# Altium PCB PCB1.PcbDoc
Units mil, origin at the board's own origin, x right, y up, seen from the top; angles counter-clockwise.
Board outline 1240 x 3200 mil, 2 copper layers (Top Layer, Bottom Layer); 43 components, 27 nets, 134 pads, 48 vias.
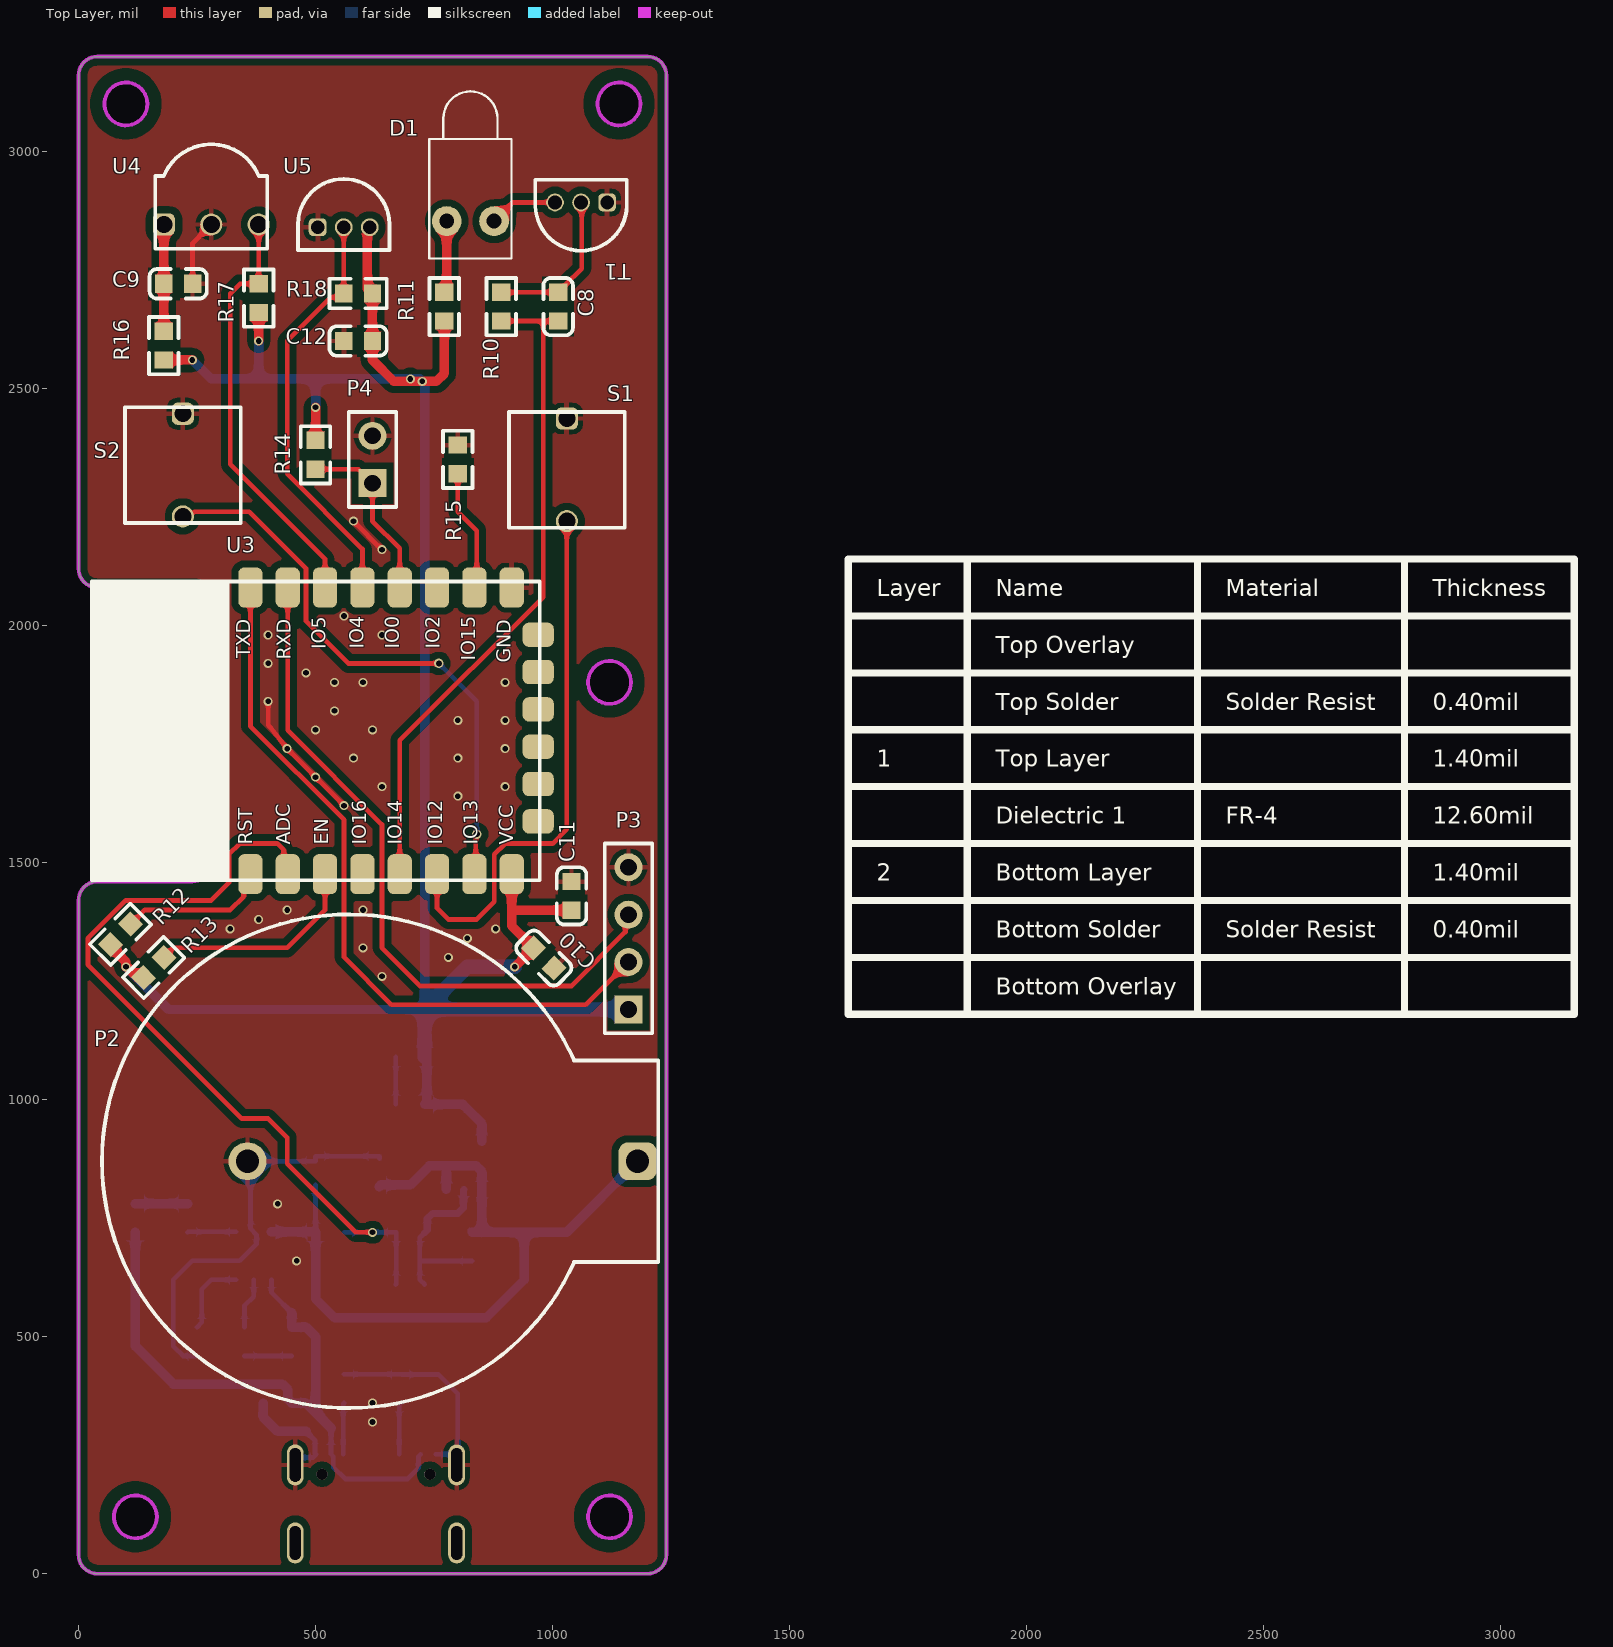
[diagram p0: Top Layer view]
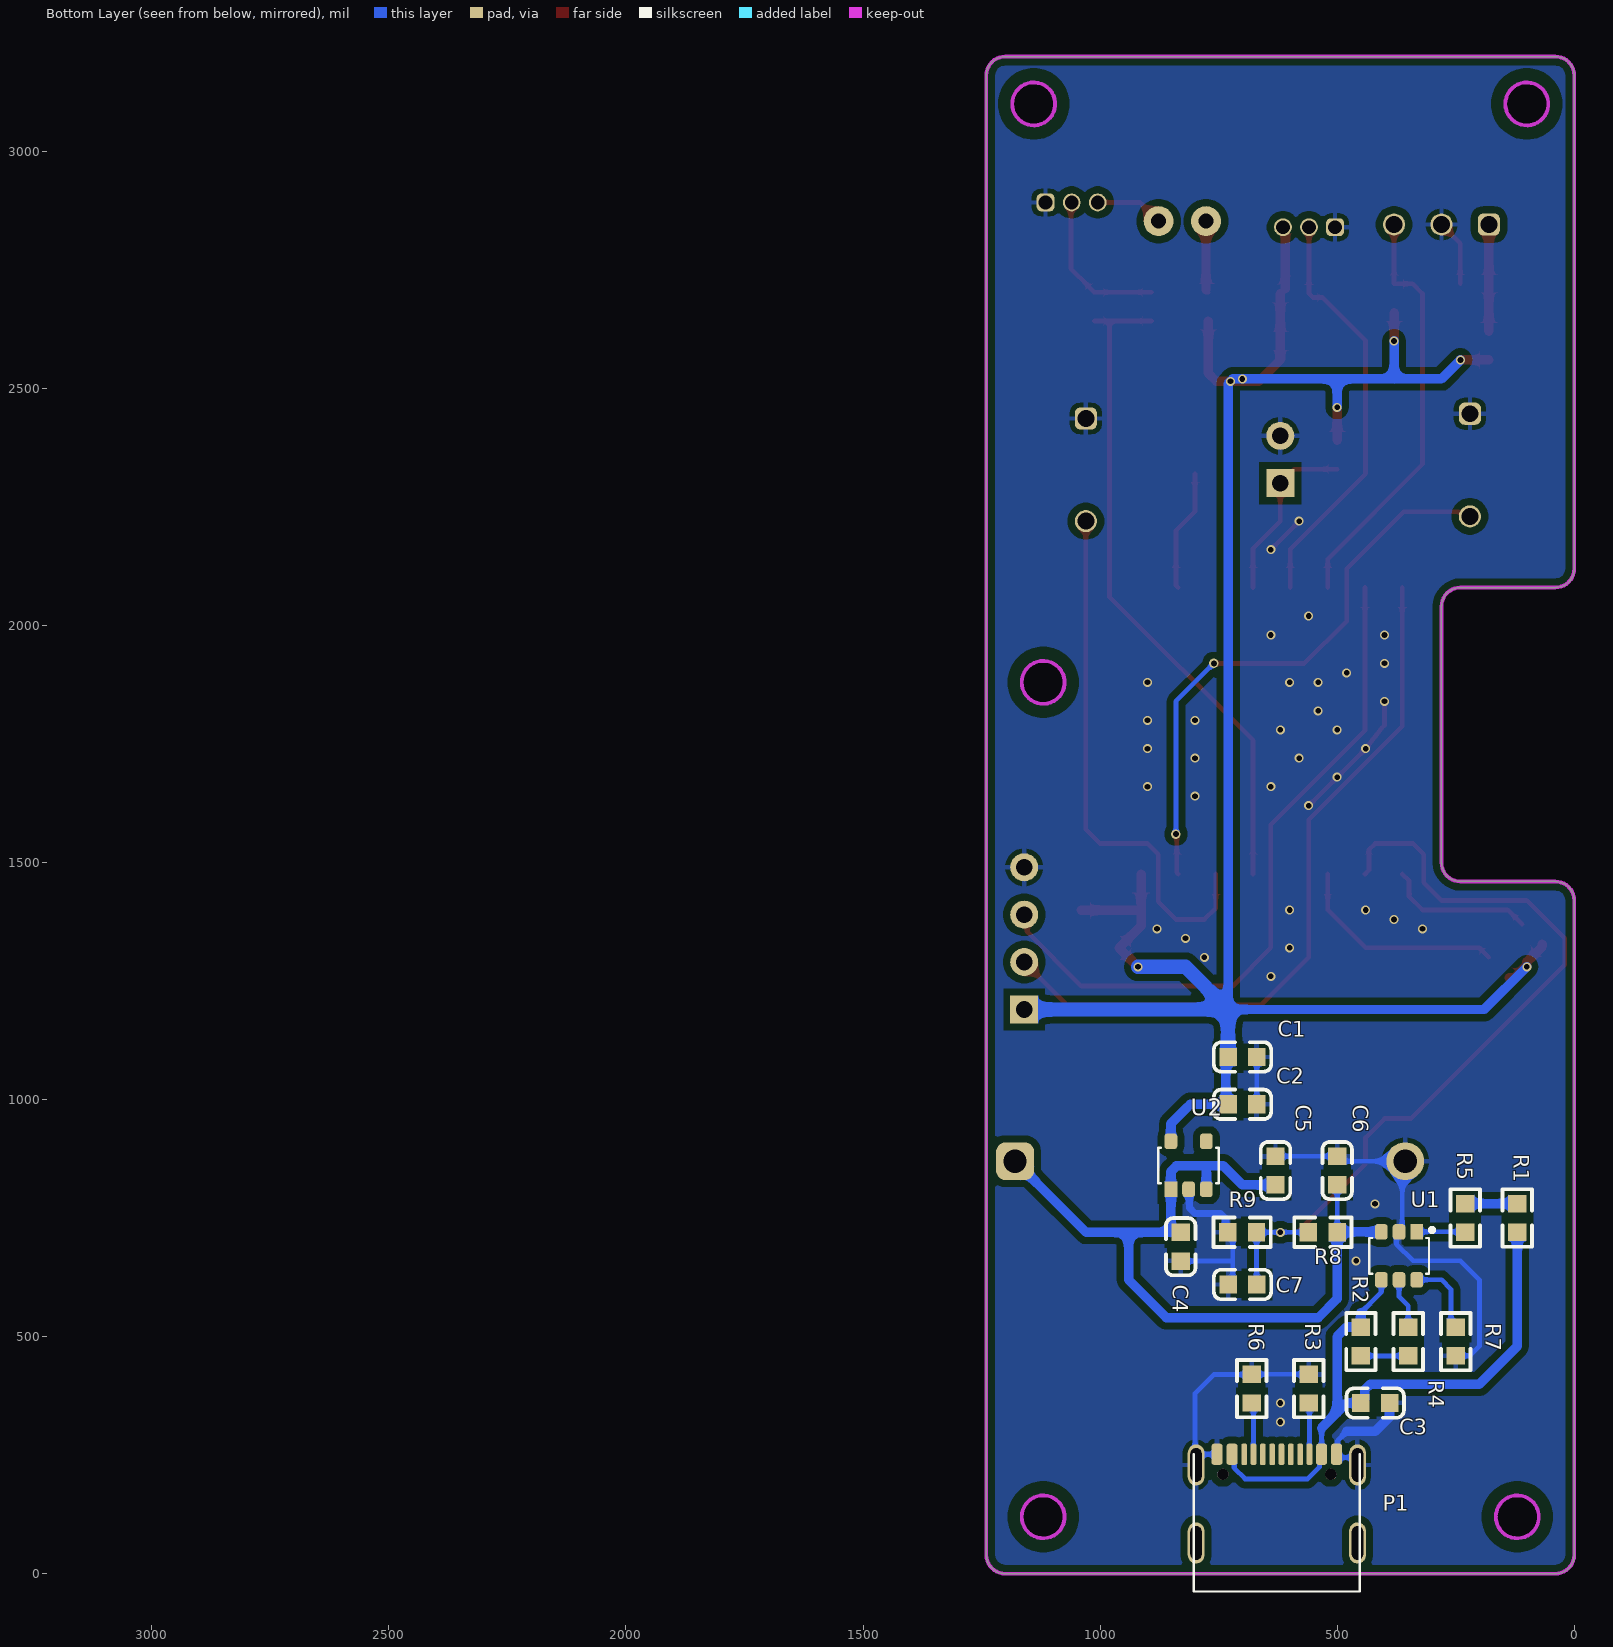
[diagram p1: Bottom Layer view, seen from below]
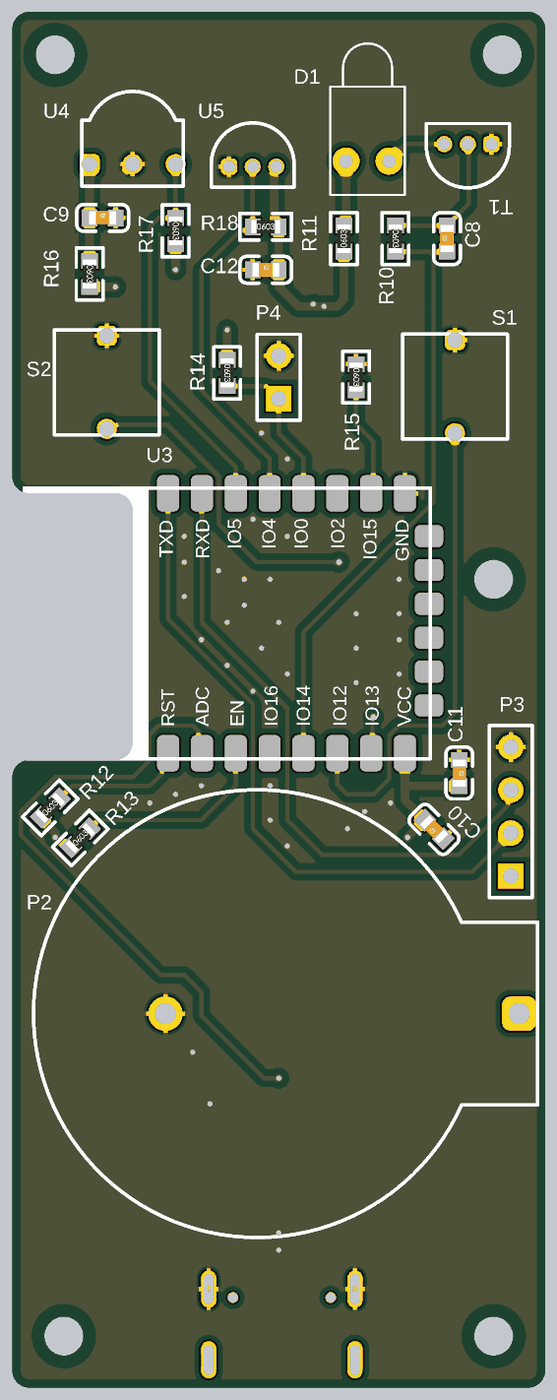
[diagram p2: 3D render of the assembled board from above, using the file's embedded part models]
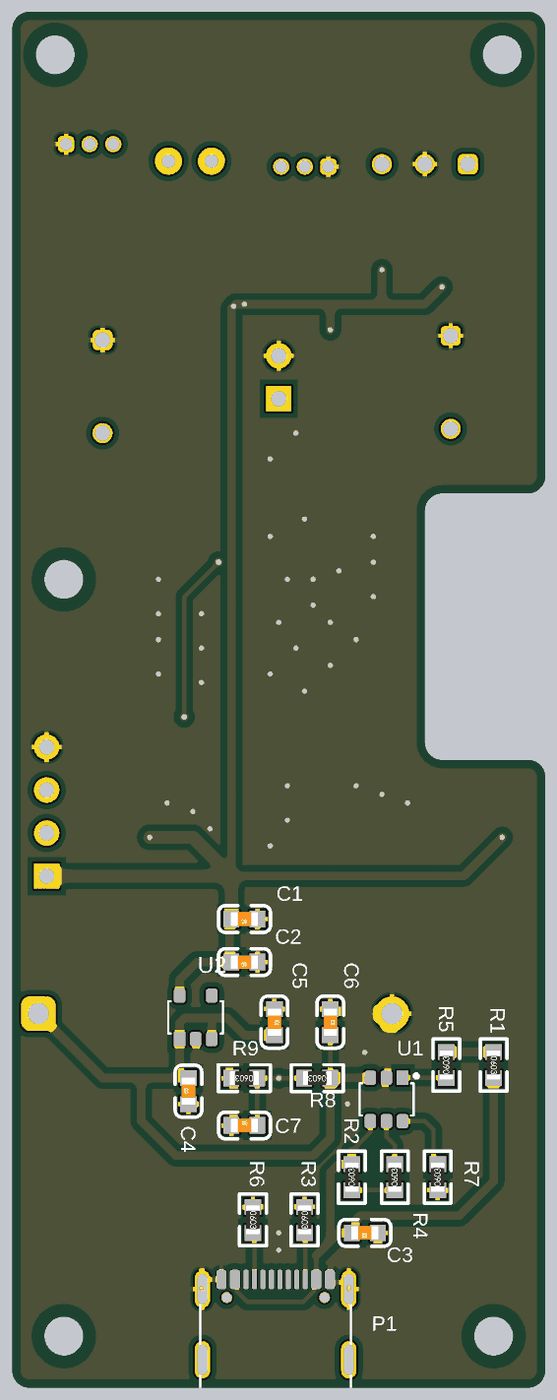
[diagram p3: 3D render of the assembled board from below, using the file's embedded part models]

## Layer stack, top to bottom
Top Solder: solder mask 0.4, Solder Resist, Dk 3.5
Top Layer: signal copper 1.4
Dielectric 1: dielectric 12.6, FR-4, Dk 4.8
Bottom Layer: signal copper 1.4
Bottom Solder: solder mask 0.4, Solder Resist, Dk 3.5

## Board outline
0,40 ccw(c40,40) 40,0 1200,0 ccw(c1200,40) 1240,40 1240,3160 ccw(c1200,3160) 1200,3200 40,3200 ccw(c40,3160) 0,3160 0,2120 ccw(c40,2120) 40,2080 240,2080 cw(c240,2040) 280,2040 280,1500 cw(c240,1500) 240,1460 40,1460 ccw(c40,1420) 0,1420
cut-out: 74.72,120 ccw(c120,120) 120,74.72 ccw(c120,120) 165.28,120 ccw(c120,120) 120,165.28 ccw(c120,120)
cut-out: 1074.72,120 ccw(c1120,120) 1120,74.72 ccw(c1120,120) 1165.28,120 ccw(c1120,120) 1120,165.28 ccw(c1120,120)
cut-out: 1074.72,1880 ccw(c1120,1880) 1120,1834.72 ccw(c1120,1880) 1165.28,1880 ccw(c1120,1880) 1120,1925.28 ccw(c1120,1880)
cut-out: 1094.72,3100 ccw(c1140,3100) 1140,3054.72 ccw(c1140,3100) 1185.28,3100 ccw(c1140,3100) 1140,3145.28 ccw(c1140,3100)
cut-out: 100,3054.72 cw(c100,3100) 54.72,3100 cw(c100,3100) 100,3145.28 cw(c100,3100) 145.28,3100 cw(c100,3100)

## Design rules (kind name [scope] priority, off if disabled: settings)
Clearance Clearance_1 [InPolygon] p1: gap=15 ignorepadtopadclearanceinfootprint=TRUE
Clearance [All] p2: gap=6 ignorepadtopadclearanceinfootprint=TRUE
MinimumSolderMaskSliver [All] p1: minsoldermaskwidth=-99
PolygonConnect PolygonConnect_1 [All vs IsVia] p1: connectstyle=Direct reliefconductorwidth=10 reliefentries=4 polygonreliefangle="90 Angle" airgapwidth=10
PolygonConnect [All] p2: connectstyle=Relief reliefconductorwidth=10 reliefentries=4 polygonreliefangle="90 Angle" airgapwidth=10
RoutingVias [All] p1: holewidth=13 width=20 viastyle="Through Hole" minholewidth=13 minwidth=20 maxholewidth=28 maxwidth=50
SilkToSilkClearance [All] p1: silktosilkclearance=-99
SilkToSolderMaskClearance [IsPad] p1: minsilkscreentomaskgap=-99 clearancetoexposedcopper=TRUE
SolderMaskExpansion [All] p1: expansion=5 istentingtop=FALSE
Width [All] p1: maxlimit=99999 minlimit=10 preferedwidth=10
27 further rules are at their usual default settings.

## Components (designator, comment, footprint, x,y, rotation, side; value= is the part's Value field where it differs from the comment)
C1 "10uF" 0603_C 699.69,1090 r0 bottom
C2 "100nF" 0603_C 699.69,990 r0 bottom
C3 "10uF" 0603_C 419.68,360 r0 bottom
C4 "4.7uF" 0603_C 830,689.69 r90 bottom
C5 "220nF" 0603_C 630,850.31 r270 bottom
C6 "4.7uF" 0603_C 500,850.31 r270 bottom
C7 "100nF" 0603_C 699.68,610 r180 bottom
C8 "1nF" 0603_C 1011.61,2672.44 r90 top
C9 "4.7uF" 0603_C 210.31,2720.63 r0 top
C10 "10uF" 0603_C 981.44,1298.56 r135 top
C11 "100nF" 0603_C 1040,1429.68 r270 top
C12 "100nF" 0603_C 589.69,2600 r0 top
D1 "LED1" LED-1 826.61,2852.76 r90 top
P1 "typeC" USB_C_M 644.53,110 r180 bottom
P2 "Header 2" CR2450 570,870 r90 top locked
P3 "Header 4" HDR1X4 1160,1190 r90 top
P4 "Header 2" HDR1X2 620,2300 r90 top
R1 "NC" 0603_R 120,750.32 r270 bottom
R2 "NC" 0603_R 450,489.68 r90 bottom
R3 "5.1KΩ ±1%" 0603_R 560,390.32 r270 bottom
R4 "NC" 0603_R 350.09,489.68 r90 bottom
R5 "NC" 0603_R 230,750.31 r90 bottom
R6 "5.1KΩ ±1%" 0603_R 680,390.32 r270 bottom
R7 "4.7K" 0603_R 250,489.68 r90 bottom
R8 "330K" 0603_R 530.31,720 r0 bottom
R9 "82K" 0603_R 700.31,720 r0 bottom
R10 "1K" 0603_R 891.61,2672.44 r270 top
R11 "51R" 0603_R 771.61,2672.44 r90 top
R12 "10K" 0603_R 88.56,1348.56 r45 top
R13 "10K" 0603_R 158.56,1278.56 r45 top
R14 "10K" 0603_R 500,2360 r270 top
R15 "10K" 0603_R 800,2350.32 r270 top
R16 "62R" 0603_R 180,2590.32 r270 top
R17 "11K" 0603_R 380,2690.32 r270 top
R18 "4.7K" 0603_R 589.68,2700 r0 top
S1 "SW-PB" 6x6-key 907.95,2450.32 r270 top
S2 "SW-PB" 6x6-key 97.95,2460.32 r270 top
T1 "9014" TO-92 1060,2940 r180 top
U1 "TP4057" SOT-23-6 370,670 r270 bottom
U2 "MG6228T5-33" SOT-23-5 817.69,861.72 r90 bottom
U3 "ESP-12F" ESP-12F-16Pin 972.76,1462.82 r90 top
U4 "HS0038B" HS0038B 280,2905.63 r180 top
U5 "ds18b20" TO-92 559.37,2792.19 r0 top

## Footprints (in the part's own frame and the unit in brackets; to place one, negate y for a bottom-side part, rotate by r counter-clockwise, add the part's x,y. Pads: shape width x height; smd on the part's side, far side on the other; paste and mask are expansions set on the pad)
6x6-key [mm]
  rrect50% 1.183x1.183 hole 0.91: 1(0.35,3.1)
  round 1.183 hole 0.91: 2(5.85,3.1)
  silkscreen extent 0,0 6.2,6.2
0603_C [mm]
  rect 0.93x0.98 smd: 1(-0.77,0) 2(0.77,0)
  silkscreen extent -1.54,-0.79 1.54,0.79, body extent -0.8,-0.4 0.8,0.4, height 0.3
0603_R [mm]
  rect 0.93x0.98 smd: 1(-0.77,0) 2(0.77,0)
  silkscreen extent -1.53,-0.79 1.54,0.79, body extent -0.85,-0.4 0.85,0.4, height 0.56
CR2450 [mil]
  rrect50% 80x80 hole 49: 1(0,-609.25)
  round 80 hole 49: 2(0,213.58)
  silkscreen extent -521,-653 521,521
ESP-12F-16Pin [mm]
  rrect50% 2.145x1.3 smd: 1(0.323,15.5) 2(0.323,13.5) 3(0.323,11.5) 4(0.323,9.5) 5(0.323,7.5) 6(0.323,5.5) 7(0.323,3.5) 8(0.323,1.5) 9(15.676,1.5) 10(15.676,3.5) 11(15.676,5.5) 12(15.676,7.5) 13(15.676,9.5) 14(15.676,11.5) 15(15.676,13.5) 16(15.676,15.5)
  rrect50% 1.3x1.67 smd: n(3.15,0.081) n(5.15,0.081) n(7.15,0.081) n(9.15,0.081) n(11.15,0.081) n(13.15,0.081)
  silkscreen extent 0,0 16,24
HDR1X2 [mm] "Connector; Header; 2 Position"
  rect 1.5x1.5 hole 0.9: 1(0,0)
  round 1.5 hole 0.9: 2(2.54,0)
  silkscreen extent -1.27,-1.27 3.81,1.27
HDR1X4 [mm] "Connector; Header; 4 Position"
  rect 1.5x1.5 hole 0.9: 1(0,0)
  round 1.5 hole 0.9: 2(2.54,0) 3(5.08,0) 4(7.62,0)
  silkscreen extent -1.27,-1.27 8.89,1.27
HS0038B [mil]
  rrect50% 46.57x46.57 hole 35.83: 1(100,60)
  round 46.57 hole 35.83: 2(0,60) 3(-100,60)
  silkscreen extent -118,-109 118,111
LED-1 [mm] "LED; 2 Leads"
  round 1.6 hole 0.8: 1(0,1.27) 2(0,-1.27)
  silkscreen extent -2,-2.2 6.95,2.2
SOT-23-5 [mm]
  rect 0.839x0.684 smd: 1(-1.295,0.838)
  rrect50% 0.839x0.684 smd: 2(-1.295,-0.112) 3(-1.295,-1.062) 4(1.276,-1.062) 5(1.276,0.838)
  silkscreen extent -0.97,-1.73 0.94,1.51
SOT-23-6 [mm]
  rect 0.839x0.684 smd: 1(-1.295,0.965)
  rrect50% 0.839x0.684 smd: 2(-1.295,0.015) 3(-1.295,-0.935) 4(1.276,-0.935) 5(1.276,0.015) 6(1.276,0.965)
  silkscreen extent -1.51,-1.57 0.94,1.89
TO-92 [mil]
  rrect50% 37.52x37.52 hole 28.86: 1(-55,47.81)
  round 37.52 hole 28.86: 2(0,47.81) 3(55,47.81)
  silkscreen extent -96,0 96,150
USB_C_M [mm]
  rrect50% 0.6x1.14 smd mask+0.051: A1B12(-2.761,3.604) A4B9(-1.961,3.604) B1A12(3.639,3.604) B4A9(2.839,3.604)
  rrect50% 0.3x1.14 smd mask+0.051: A5(-0.811,3.604) A6(0.189,3.604) A7(0.689,3.604) A8(1.689,3.604) B5(2.188,3.604) B6(1.189,3.604) B7(-0.311,3.604) B8(-1.311,3.604)
  oval 0.9x2.2 hole 0.6 slot 1.8 at 90 deg: G(-3.886,-1.146) G(-3.886,3.034) G(4.764,-1.146) G(4.764,3.034)
  round 0.6 hole 0.6: NC(-2.451,2.534) NC(3.328,2.534)
  silkscreen extent -4.01,-3.75 4.89,3.6

## Part data
C1 C3 C10: library part "0603 10uF (106) 10% 10V", "Chip capacitors", Manufacturer="Samsung Electro-Mechanics", Package=0603, PartNumber=CL10A106KP8NNNC, SuppliersPartNumber=C19702, Tolerance=10%, Voltage=10V, Capacitance=10uF, ComponentLink1Description="Supplier link", ComponentLink1URL=http://www.szlcsc.com/product/details_20411.html, Supplier=LC
C2 C7 C11: library part "0603 100nF (104) 10% 50V", "Chip capacitors", Manufacturer=YAGEO, Package=0603, PartNumber=CC0603KRX7R9BB104, SuppliersPartNumber=C14663, Tolerance=10%, Voltage=50V, Capacitance=100nF, ComponentLink1Description="Supplier link", ComponentLink1URL=http://www.szlcsc.com/product/details_15331.html, Supplier=LC
C4 C6: library part "0603 4.7uF (475) 10% 16V", "Chip capacitors", Manufacturer="Samsung Electro-Mechanics", Package=0603, PartNumber=CL10A475KO8NNNC, SuppliersPartNumber=C19666, Tolerance=10%, Voltage=16V, Capacitance=4.7uF, ComponentLink1Description="Supplier link", ComponentLink1URL=http://www.szlcsc.com/product/details_20375.html, Supplier=LC
C5: library part "0603 100nF (104) 10% 50V", "Chip capacitors", Capacitance=100nF, Manufacturer=YAGEO, Package=0603, PartNumber=CC0603KRX7R9BB104, SuppliersPartNumber=C14663, Tolerance=10%, Voltage=50V, ComponentLink1Description="Supplier link", ComponentLink1URL=http://www.szlcsc.com/product/details_15331.html, Supplier=LC
C8 C9 C12: library part "0603 10uF (106) 10% 10V", "Chip capacitors", Capacitance=10uF, Manufacturer="Samsung Electro-Mechanics", Package=0603, PartNumber=CL10A106KP8NNNC, SuppliersPartNumber=C19702, Tolerance=10%, Voltage=10V, ComponentLink1Description="Supplier link", ComponentLink1URL=http://www.szlcsc.com/product/details_20411.html, Supplier=LC
D1: "Typical RED GaAs LED", LatestRevisionDate=08-Jul-2005, LatestRevisionNote="Mech Layer 1 removed.", PackageDescription="LED; 2 Leads", PackageReference=LED-1, Published=8-Jun-2000, Publisher="Altium Limited"
P2 P4: "Header, 2-Pin"
  P4: LatestRevisionDate=17-Jul-2002, LatestRevisionNote="Re-released for DXP Platform.", Publisher="Altium Limited"
P3: "Header, 4-Pin", LatestRevisionDate=17-Jul-2002, LatestRevisionNote="Re-released for DXP Platform.", Publisher="Altium Limited"
R1 R2 R4 R5: library part "0603 10K (1002) 1%", "Chip resistor", Manufacturer="Uniroyal Elec", Package=0603, PartNumber=0603WAF1002T5E, Power=1/10W, Resistance=10KΩ, SuppliersPartNumber=C25804, Tolerance=1%, ComponentLink1Description="Supplier link", ComponentLink1URL=http://www.szlcsc.com/product/details_26547.html, Supplier=LC
R3 R6 R7 R8 R9 R10 R11 R12 R13 R14 R15 R16 R17 R18: library part "0603 2.4K (2401) 1%", "Chip resistor", Manufacturer="Uniroyal Elec", Package=0603, PartNumber=0603WAF2401T5E, Power=1/10W, Resistance=2.4KΩ, SuppliersPartNumber=C22940, Tolerance=1%, ComponentLink1Description="Supplier link", ComponentLink1URL=http://www.szlcsc.com/product/details_23667.html, Supplier=LC
S1 S2: "Switch", LatestRevisionDate=17-Jul-2002, LatestRevisionNote="Re-released for DXP Platform.", PackageDescription="Switch; 2 Leads", PackageReference=SPST-2, Published=24-Mar-1999, Publisher="Altium Limited"

## Via types
v1: diameter 19, hole 12, Top Layer to Bottom Layer, tented both sides, 46 vias
v2: diameter 20, hole 13, Top Layer to Bottom Layer, tented both sides, 2 vias

## Nets (pads, with @x,y where several pads share a name; then routed paths per layer and width w, separated by ;. In a path a pad name is that pad's centre, name@x,y a point inside that pad or via, vN(x,y) a via of type N, cw(c..) or ccw(c..) an arc to the next point about the centre after c; other vN are vias at no path point)
+3D3: C1.2 C2.2 C10.2 C11.2 C12.2 P3.1 R11.1 R12.1 R13.1 R14.1 R16.2 R17.2 R18.2 U2.5 U3.8 U5.3 | length 4894.7
  Top Layer w10: R18.2@609.37,2710.63 R18.2 ; 920,1400 920.63,1399.37
  Top Layer w20: R12.1 67.13,1323.16 100,1290.29 v1(100,1280) 102.51,1280 125.38,1257.13 R13.1 ; R16.2 v1(240,2560) ; v1(380,2600) R17.2 ; R14.1 v1(500,2460) ; R18.2@609.37,2710.63 U5.3@609.37,2840 ; R18.2 C12.2 620,2560 665,2515 755,2515 771.61,2531.61 R11.1 ; U3.8 913.7,1366.3 C10.2 v1(920,1280) ; 920.63,1399.37 C11.2
  Bottom Layer w10: C2.2 C2.2@734.72,994.72 ; C1.2 C1.2@734.72,1085.28
  Bottom Layer w20: v1(100,1280) 190,1190 730,1190 730,2510 v1(725,2515) 720,2520 v1(700,2520) 500,2520 ; v1(240,2560) 280,2520 380,2520 ; v1(380,2600) 380,2520 ; v1(500,2460) 500,2520 ; C2.2 810,990 819.97,980.03 850.67,949.33 U2.5 ; C2.2@734.72,994.72 C1.2@734.72,1085.28 ; 380,2520 500,2520
  Bottom Layer w30: C1.2 730,1190 ; v1(920,1280) 820,1280 730,1190 ; P3.1 730,1190
+5: C3.2 P1.A4B9 P1.B4A9 R1.2 R2.2 U1.4 | length 1386.5
  Bottom Layer w10: U1.4 406.83,593.17 450,550 ; 532.78,307.22 P1.B4A9 537.46,247.18 537.46,224.95 562.41,200 694.14,200 717.07,222.92 717.07,247.18 P1.A4B9
  Bottom Layer w20: R1.2 120,480 200,400 429.98,400 441.69,388.28 441.69,368.31 C3.2 480,360 500,340 ; 450,550 R2.2 480,520 500,500 500,340 ; 532.78,307.22 500,340
ADC: C7.2 R8.2 R9.1 U3.2 | length 1732.8
  Top Layer w10: U3.2 433.08,1483.73 433.08,1526.92 420,1540 340,1540 317.37,1517.37 317.37,1457.37 280,1420 100,1420 20,1340 20,1284.4 344.4,960 400,960 440,920 440,864.4 545.58,758.82 584.4,720 v1(620,720)
  Bottom Layer w10: R8.2 v1(620,720) R9.1 670,610.63 C7.2
B+: C4.2 C5.2 C6.2 P2.1 R8.1 U1.3 U2.1 U2.3 | length 1773.9
  Bottom Layer w10: R8.1@499.02,720.98 R8.1 C6.2 ; C5.2 C5.2@633.87,816.13 ; C4.2@825.28,724.72 C4.2 ; 850.67,720 860,720
  Bottom Layer w20: U1.3 R8.1@499.02,720.98 ; R8.1 500,580 540,540 860,540 940,620 940,720 ; C5.2@633.87,816.13 637.74,820 700,820 740,860 775,860 ; U2.3 775.86,859.14 775,860 ; C4.2 850.67,720 ; P2.1 1029.25,720 940,720 ; 775,860 838.95,860 850.67,848.28 U2.1 850.67,720 ; 850.67,720 940,720
B-: C1.1 C2.1 C3.1 C4.1 C5.1 C6.1 C7.1 C9.2 C10.1 C11.1 C12.1 P1.A1B12 P1.B1A12 P1.G@456.99,229.43 P1.G@797.54,229.43 P2.2 P3.4 P4.2 R3.1 R6.1 R7.1 R9.2 R15.1 S1.1 S2.1 T1.1 U1.2 U2.2 U3.9 U4.2 U5.1 | length 2599.5
  Top Layer w10: C9.2 240.63,2806.26 U4.2 ; v1(400,1840) 400,1789.36 406.69,1782.68 v1(440,1740) v1(500,1680) v1(560,1620) ; v1(580,2220) v1(640,2160)
  Bottom Layer w10: R7.1 220.63,459.37 200,480 200,620 240,660 340,660 375.33,695.33 375.33,715.09 362.92,727.49 362.92,863.49 P2.2 500,870 C6.1 C5.1 ; P1.G@456.99,229.43 456.99,233.43 468.74,245.18 494.59,245.18 P1.B1A12 498.7,254.45 498.7,281.3 480,300 ; R3.1 R6.1 680.63,420 760,420 800,380 800,231.89 797.54,229.43 797.54,240.12 785.79,251.87 P1.A1B12 ; C2.1 C1.1 ; C7.1 720,620 720,660 ; R9.2 720,709.37 720,660 ; C4.1 720.63,659.37 720,660 ; C5.1 635.44,880.63 635.44,875.19 C5.1
  Bottom Layer w15: R9.2 735.63,725 735.63,749.29 746.34,760 800,760 811.72,771.72 811.72,809.2 U2.2
  Bottom Layer w20: C3.1 389.37,330.63 420,300 480,300
  other v1: 620,320 620,360 460,660 420,780 640,1260 780,1300 600,1320 820,1340 320,1360 880,1360 380,1380 440,1400 600,1400 800,1640 640,1660 900,1660 580,1720 800,1720 900,1740 500,1780 620,1780 800,1800 900,1800 540,1820 540,1880 600,1880 900,1880 480,1900 400,1920 400,1980 640,1980 560,2020
DS18B20-Out: R18.1 U3.13 U5.2 | length 886.5
  Top Layer w10: U5.2 R18.1 551.29,2691.92 531.92,2691.92 440,2600 440,2320 598.74,2161.26 U3.13
HS0038B-Out: R17.1 U3.14 U4.3 | length 896.4
  Top Layer w10: U4.3 R17.1 340.63,2720.63 320,2700 320,2340 520,2140 U3.14
NetC8_2: C8.2 R10.1 T1.2 | length 331.4
  Top Layer w10: R10.1 C8.2 1012.6,2702.76 1025.91,2716.06 1025.91,2717.05 1061.61,2752.76 1061.61,2890.58 T1.2
NetC9_1: C9.1 R16.1 U4.1 | length 225
  Top Layer w20: R16.1 C9.1 U4.1
NetD1_1: D1.1 R11.2 | length 152.1
  Top Layer w10: R11.2 R11.2@776.61,2707.76
  Top Layer w20: R11.2@776.61,2707.76 D1.1
NetD1_2: D1.2 T1.3 | length 149.7
  Top Layer w10: D1.2 916.05,2892.19 T1.3@1010,2892.19
NetP1_A5: P1.A5 R6.2 | length 109.6
  Bottom Layer w10: P1.A5 676.48,356.48 R6.2
NetP1_B5: P1.B5 R3.2 | length 108.8
  Bottom Layer w10: P1.B5 558.37,358.37 R3.2
NetP3_2: P3.2 U3.16 | length 1540.5
  Top Layer w10: U3.16 362.52,1787.65 560,1590.17 560,1300 660,1200 1070,1200 P3.2
NetP3_3: P3.3 U3.15 | length 1475.5
  Top Layer w10: U3.15 441.26,1778.74 640,1580 640,1320 720.46,1239.54 1039.54,1239.54 1153.51,1353.51 1153.51,1383.51 P3.3
NetP4_1: P4.1 R14.2 U3.12 | length 376.1
  Top Layer w10: R14.2 590.32,2329.68 P4.1 620,2220 677.48,2162.52 U3.12
NetR1_1: R1.1 R5.2 | length 110
  Bottom Layer w20: R1.1 R5.2
NetR2_1: R2.1 R4.1 | length 99.9
  Bottom Layer w10: R4.1 R2.1
NetR4_2: R4.2 U1.5 | length 107.8
  Bottom Layer w10: R4.2 350.09,564.88 369.43,584.22 U1.5
NetR5_1: R5.1 U1.1 | length 102.4
  Bottom Layer w10: R5.1 230.98,720.98 U1.1
NetR7_2: R7.2 U1.6 | length 164.4
  Bottom Layer w10: R7.2 260,530 260,600 279.78,619.78 U1.6
NetR12_2: R12.2 U3.1 | length 315.6
  Top Layer w10: R12.2 140,1400 320,1400 348.27,1428.27 348.27,1461.3 U3.1
NetR13_2: R13.2 U3.3 | length 457
  Top Layer w10: R13.2 200,1320 440,1320 520,1400 U3.3
NetR15_2: R15.2 U3.10 | length 258.7
  Top Layer w10: R15.2 800,2240 840,2200 840,2085.04 U3.10
NetS1_2: S1.2 U3.6 | length 1142.7
  Top Layer w10: U3.6 756.22,1403.78 780,1380 840,1380 877.11,1417.11 877.11,1517.11 900,1540 1000,1540 1030,1570 S1.2
NetS2_2: S2.2 U3.7 | length 1221.3
  Top Layer w10: S2.2 227,2237 241.14,2237 244.15,2240 360,2240 480,2120 480,2009.23 569.23,1920 v2(760,1920) ; U3.7 838.09,1478.68 838.09,1558.09 v2(840,1560)
  Bottom Layer w10: v2(760,1920) 840,1840 v2(840,1560)
Sig-Out: C8.1 R10.2 U3.5 | length 1411.9
  Top Layer w10: U3.5 677.48,1757.48 980,2060 980,2642.13 ; R10.2 980,2642.13 ; C8.1 980,2642.13
pads on no net: P1.A6 P1.A7 P1.A8 P1.B6 P1.B7 P1.B8 P1.G@456.99,64.86 P1.G@797.54,64.86 P1.NC U2.4 U3.4 U3.11 U3.n

## Polygon pours and split planes (outlines as drawn)
B- on Bottom Layer "B-_L02_P000" (solid, remove dead copper, pour order 0): -100,3260 1340,3260 1340,-80 -100,-80 -100,-60
B- on Top Layer "B-_L01_P001" (solid, remove dead copper, pour order 1): -100,3260 1340,3260 1340,-80 -100,-80 -100,-60

## Keep-outs
Keep-Out Layer:
  circle w7.99: c1120,120 r45.28
  circle w7.99: c120,120 r45.28
  circle w7.99: c1120,1880 r45.28
  circle w7.99: c1140,3100 r45.28
  circle w7.99: c100,3100 r45.28
  lines w8: 0,40 ccw(c40,40) 40,0 1200,0 ccw(c1200,40) 1240,40 1240,3160 ccw(c1200,3160) 1200,3200 40,3200 ccw(c40,3160) 0,3160 0,2120 ccw(c40,2120) 40,2080 240,2080 cw(c240,2040) 280,2040 280,1500 cw(c240,1500) 240,1460 40,1460 ccw(c40,1420) 0,1420 0,40

## Other copper
Top Layer:
  pour cut-out: 25.2,3100 ccw(c100,3100) 100,3025.2 ccw(c100,3100) 174.8,3100 ccw(c100,3100) 100,3174.8 ccw(c100,3100)
  pour cut-out: 1065.2,3100 ccw(c1140,3100) 1140,3025.2 ccw(c1140,3100) 1214.8,3100 ccw(c1140,3100) 1140,3174.8 ccw(c1140,3100)
  pour cut-out: 1045.2,1880 ccw(c1120,1880) 1120,1805.2 ccw(c1120,1880) 1194.8,1880 ccw(c1120,1880) 1120,1954.8 ccw(c1120,1880)
  pour cut-out: 1045.2,120 ccw(c1120,120) 1120,45.2 ccw(c1120,120) 1194.8,120 ccw(c1120,120) 1120,194.8 ccw(c1120,120)
  pour cut-out: 45.2,120 ccw(c120,120) 120,45.2 ccw(c120,120) 194.8,120 ccw(c120,120) 120,194.8 ccw(c120,120)
Bottom Layer:
  pour cut-out: 25.2,3100 ccw(c100,3100) 100,3025.2 ccw(c100,3100) 174.8,3100 ccw(c100,3100) 100,3174.8 ccw(c100,3100)
  pour cut-out: 1065.2,3100 ccw(c1140,3100) 1140,3025.2 ccw(c1140,3100) 1214.8,3100 ccw(c1140,3100) 1140,3174.8 ccw(c1140,3100)
  pour cut-out: 1045.2,1880 ccw(c1120,1880) 1120,1805.2 ccw(c1120,1880) 1194.8,1880 ccw(c1120,1880) 1120,1954.8 ccw(c1120,1880)
  pour cut-out: 1045.2,120 ccw(c1120,120) 1120,45.2 ccw(c1120,120) 1194.8,120 ccw(c1120,120) 1120,194.8 ccw(c1120,120)
  pour cut-out: 45.2,120 ccw(c120,120) 120,45.2 ccw(c120,120) 194.8,120 ccw(c120,120) 120,194.8 ccw(c120,120)

## Silkscreen, mask and mechanical layers (free items; w line width, h text height)
Top Overlay:
  lines w15: 1623.46,1300 1874.56,1300 2360,1300 2796.33,1300 3154.67,1300 ; 1623.46,1420 1874.56,1420 2360,1420 2796.33,1420 3154.67,1420 ; 1623.46,1540 1874.56,1540 2360,1540 2796.33,1540 3154.67,1540 ; 1623.46,1660 1874.56,1660 2360,1660 2796.33,1660 3154.67,1660 ; 1623.46,1780 1874.56,1780 2360,1780 2796.33,1780 3154.67,1780 ; 1623.46,1900 1874.56,1900 2360,1900 2796.33,1900 3154.67,1900 ; 1623.46,2020 3154.67,2020 ; 1874.56,2140 1874.56,1180 ; 2360,2140 2360,1180 ; 2796.33,2140 2796.33,1180 ; 1874.56,1180 1623.46,1180 1623.46,2140 3154.67,2140 3154.67,1180 2796.33,1180 ; 1874.56,1180 2360,1180 ; 2360,1180 2796.33,1180
  text "Layer" at 1683.46,2050 h60
  text "Name" at 1934.56,2050 h60
  text "Material" at 2420,2050 h60
  text "Thickness" at 2856.33,2050 h60
  text "Top Overlay" at 1934.56,1930 h60
  text "Top Solder" at 1934.56,1810 h60
  text "Solder Resist" at 2420,1810 h60
  text "0.40mil" at 2856.33,1810 h60
  text "1" at 1683.46,1690 h60
  text "Top Layer" at 1934.56,1690 h60
  text "1.40mil" at 2856.33,1690 h60
  text "Dielectric 1" at 1934.56,1570 h60
  text "FR-4" at 2420,1570 h60
  text "12.60mil" at 2856.33,1570 h60
  text "2" at 1683.4,1450 h60
  text "Bottom Layer" at 1934.56,1450 h60
  text "1.40mil" at 2856.33,1450 h60
  text "Bottom Solder" at 1934.56,1330 h60
  text "Solder Resist" at 2420,1330 h60
  text "0.40mil" at 2856.33,1330 h60
  text "Bottom Overlay" at 1934.56,1210 h60
Drill Drawing:
  circle w10: c-1402.36,5035.15 r19.34
  circle w10: c-1402.36,5035.15 r32.23
  circle w10: c-1402.36,4745.11 r32.23
  lines w10: -1434.59,3762.19 -1370.14,3762.19 -1402.36,3697.73 -1434.59,3762.19 ; -1434.59,3842.75 -1434.59,3858.87 -1418.48,3874.98 -1434.59,3891.09 -1434.59,3907.21 -1418.48,3907.21 -1402.36,3891.09 -1386.25,3907.21 -1370.14,3907.21 -1370.14,3891.09 -1386.25,3874.98 -1370.14,3858.87 -1370.14,3842.75 -1386.25,3842.75 -1402.36,3858.87 -1418.48,3842.75 -1434.59,3842.75 ; -1434.59,4020 -1402.36,3987.77 -1370.14,4020 -1402.36,4052.23 -1434.59,4020 ; -1434.59,4132.8 -1402.36,4148.91 -1370.14,4132.8 -1386.25,4165.02 -1370.14,4197.25 -1402.36,4181.14 -1434.59,4197.25 -1418.48,4165.02 -1434.59,4132.8 ; -1434.59,4293.93 -1418.48,4293.93 -1402.36,4277.82 -1386.25,4293.93 -1370.14,4293.93 -1386.25,4310.04 -1370.14,4326.16 -1386.25,4326.16 -1402.36,4342.27 -1418.48,4326.16 -1434.59,4326.16 -1418.48,4310.04 -1434.59,4293.93 ; -1434.59,4438.95 -1418.48,4438.95 -1418.48,4422.84 -1386.25,4422.84 -1386.25,4438.95 -1370.14,4438.95 -1370.14,4471.18 -1386.25,4471.18 -1386.25,4487.29 -1418.48,4487.29 -1418.48,4471.18 -1434.59,4471.18 -1434.59,4438.95 ; -1434.59,4567.86 -1370.14,4567.86 -1370.14,4632.31 -1434.59,4632.31 -1434.59,4567.86 ; -1434.59,4922.36 -1370.14,4922.36 -1402.36,4857.9 -1434.59,4922.36 ; -1421.7,4909.47 -1383.03,4909.47 -1402.36,4870.79 -1421.7,4909.47
  lines w15: -1492.5,3654.23 2850.27,3654.23 ; -1492.5,5104.44 2850.27,5104.44 ; -1119.9,3509.2 -1119.9,5249.46 ; -813.97,3509.2 -813.97,5249.46 ; -173.18,3509.2 -173.18,5249.46 ; 115.83,3509.2 115.83,5249.46 ; 536.44,3509.2 536.44,5249.46 ; 1332.75,3509.2 1332.75,5249.46 ; 1677.52,3509.2 1677.52,5249.46 ; 2127.81,3509.2 2127.81,5249.46 ; -1492.5,3509.2 2850.27,3509.2 2850.27,5249.46 -1492.5,5249.46 -1492.5,3509.2
  text "Symbol" at -1405.49,5147.95 h84
  text "Count" at -1076.39,5147.95 h84
  text "Hole Size" at -770.47,5147.95 h84
  text "Plated" at -129.68,5147.95 h84
  text "Hole Type" at 159.34,5147.95 h84
  text "Drill Layer Pair" at 579.95,5147.95 h84
  text "Via/Pad" at 1376.25,5147.95 h84
  text "Pad Shape" at 1721.03,5147.95 h84
  text "Template" at 2171.32,5147.95 h84
  text "46" at -1076.39,5002.92 h70
  text "12.00mil (0.305mm)" at -770.47,5002.92 h70
  text "PTH" at -129.68,5002.92 h70
  text "Round" at 159.34,5002.92 h70
  text "Top Layer - Bottom Layer" at 579.95,5002.92 h70
  text "Via" at 1376.25,5002.92 h70
  text "Rounded" at 1721.03,5002.92 h70
  text "v48h30m0mx0" at 2171.32,5002.92 h70
  text "2" at -1076.39,4857.9 h70
  text "13.00mil (0.330mm)" at -770.47,4857.9 h70
  text "PTH" at -129.68,4857.9 h70
  text "Round" at 159.34,4857.9 h70
  text "Top Layer - Bottom Layer" at 579.95,4857.9 h70
  text "Via" at 1376.25,4857.9 h70
  text "Rounded" at 1721.03,4857.9 h70
  text "v51h33m0mx0" at 2171.32,4857.9 h70
  text "2" at -1076.39,4712.88 h70
  text "23.62mil (0.600mm)" at -770.47,4712.88 h70
  text "PTH" at -129.68,4712.88 h70
  text "Round" at 159.34,4712.88 h70
  text "Top Layer - Bottom Layer" at 579.95,4712.88 h70
  text "Pad" at 1376.25,4712.88 h70
  text "Rounded" at 1721.03,4712.88 h70
  text "c60h60" at 2171.32,4712.88 h70
  text "4" at -1076.39,4567.86 h70
  text "23.62mil (0.600mm)" at -770.47,4567.86 h70
  text "PTH" at -129.68,4567.86 h70
  text "Slot" at 159.34,4567.86 h70
  text "Top Layer - Bottom Layer" at 579.95,4567.86 h70
  text "Pad" at 1376.25,4567.86 h70
  text "Rounded" at 1721.03,4567.86 h70
  text "r220_90h60_180r100" at 2171.32,4567.86 h70
  text "6" at -1076.39,4422.84 h70
  text "28.86mil (0.733mm)" at -770.47,4422.84 h70
  text "PTH" at -129.68,4422.84 h70
  text "Round" at 159.34,4422.84 h70
  text "Top Layer - Bottom Layer" at 579.95,4422.84 h70
  text "Pad" at 1376.25,4422.84 h70
  text "(Mixed)" at 1721.03,4422.84 h70
  text "(Mixed)" at 2171.32,4422.84 h70
  text "2" at -1076.39,4277.82 h70
  text "31.50mil (0.800mm)" at -770.47,4277.82 h70
  text "PTH" at -129.68,4277.82 h70
  text "Round" at 159.34,4277.82 h70
  text "Top Layer - Bottom Layer" at 579.95,4277.82 h70
  text "Pad" at 1376.25,4277.82 h70
  text "Rounded" at 1721.03,4277.82 h70
  text "c160h80" at 2171.32,4277.82 h70
  text "6" at -1076.39,4132.8 h70
  text "35.43mil (0.900mm)" at -770.47,4132.8 h70
  text "PTH" at -129.68,4132.8 h70
  text "Round" at 159.34,4132.8 h70
  text "Top Layer - Bottom Layer" at 579.95,4132.8 h70
  text "Pad" at 1376.25,4132.8 h70
  text "(Mixed)" at 1721.03,4132.8 h70
  text "(Mixed)" at 2171.32,4132.8 h70
  text "3" at -1076.39,3987.77 h70
  text "35.83mil (0.910mm)" at -770.47,3987.77 h70
  text "PTH" at -129.68,3987.77 h70
  text "Round" at 159.34,3987.77 h70
  text "Top Layer - Bottom Layer" at 579.95,3987.77 h70
  text "Pad" at 1376.25,3987.77 h70
  text "(Mixed)" at 1721.03,3987.77 h70
  text "(Mixed)" at 2171.32,3987.77 h70
  text "4" at -1076.39,3842.75 h70
  text "35.83mil (0.910mm)" at -770.47,3842.75 h70
  text "PTH" at -129.68,3842.75 h70
  text "Round" at 159.34,3842.75 h70
  text "Top Layer - Bottom Layer" at 579.95,3842.75 h70
  text "Pad" at 1376.25,3842.75 h70
  text "(Mixed)" at 1721.03,3842.75 h70
  text "(Mixed)" at 2171.32,3842.75 h70
  text "2" at -1076.39,3697.73 h70
  text "49.00mil (1.245mm)" at -770.47,3697.73 h70
  text "PTH" at -129.68,3697.73 h70
  text "Round" at 159.34,3697.73 h70
  text "Top Layer - Bottom Layer" at 579.95,3697.73 h70
  text "Pad" at 1376.25,3697.73 h70
  text "(Mixed)" at 1721.03,3697.73 h70
  text "(Mixed)" at 2171.32,3697.73 h70
  text "77 Total" at -1076.39,3552.71 h70
  text "Slot definitions :" at -1405.49,3451.2 h70
  text "Routed Path Length" at -928.28,3451.2 h70
  text "= Calculated from tool start centre position to tool end centre position." at -336.99,3451.2 h70
  text "Hole Length" at -928.28,3393.19 h70
  text "= Routed Path Length + Tool Size = Slot length as defined in the PCB layout" at -556.44,3393.19 h70

## Text inside footprints (layer, text, board x,y; h text height)
U3: Top Overlay "RST" at 377.23,1537.82 h50 r90; Top Overlay "ADC" at 457.23,1537.82 h50 r90; Top Overlay "EN" at 537.76,1537.82 h50 r90; Top Overlay "IO16" at 617.23,1537.82 h50 r90; Top Overlay "IO14" at 692.23,1537.82 h50 r90; Top Overlay "IO12" at 777.23,1537.82 h50 r90; Top Overlay "IO13" at 852.23,1537.82 h50 r90; Top Overlay "VCC" at 927.23,1537.86 h50 r90; Top Overlay "GND" at 922.23,1921.72 h50 r90; Top Overlay "IO15" at 847.23,1925.39 h50 r90; Top Overlay "IO2" at 772.23,1950.85 h50 r90; Top Overlay "IO0" at 687.23,1950.62 h50 r90; Top Overlay "IO4" at 612.23,1950.62 h50 r90; Top Overlay "IO5" at 532.23,1950.28 h50 r90; Top Overlay "RXD" at 457.76,1927.82 h50 r90; Top Overlay "TXD" at 372.76,1930.34 h50 r90